# EAGLE board ME433_PCB (EAGLE 8.1.0)
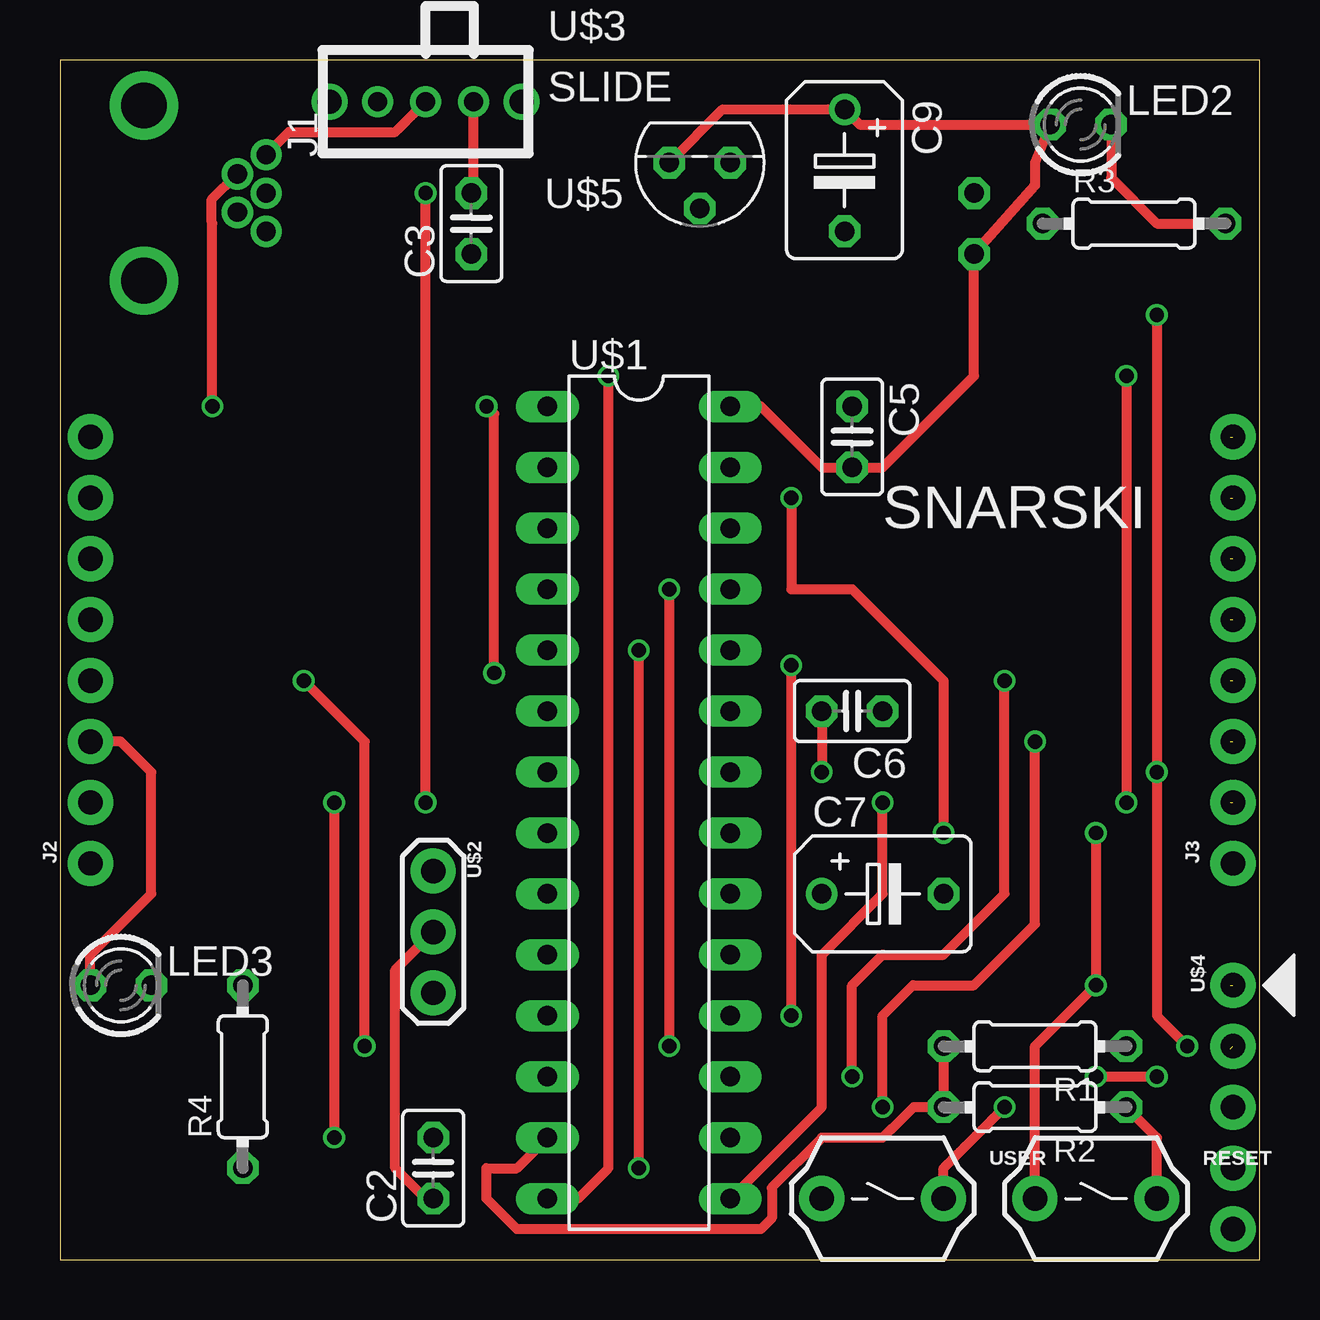
[diagram p0: board, top side]
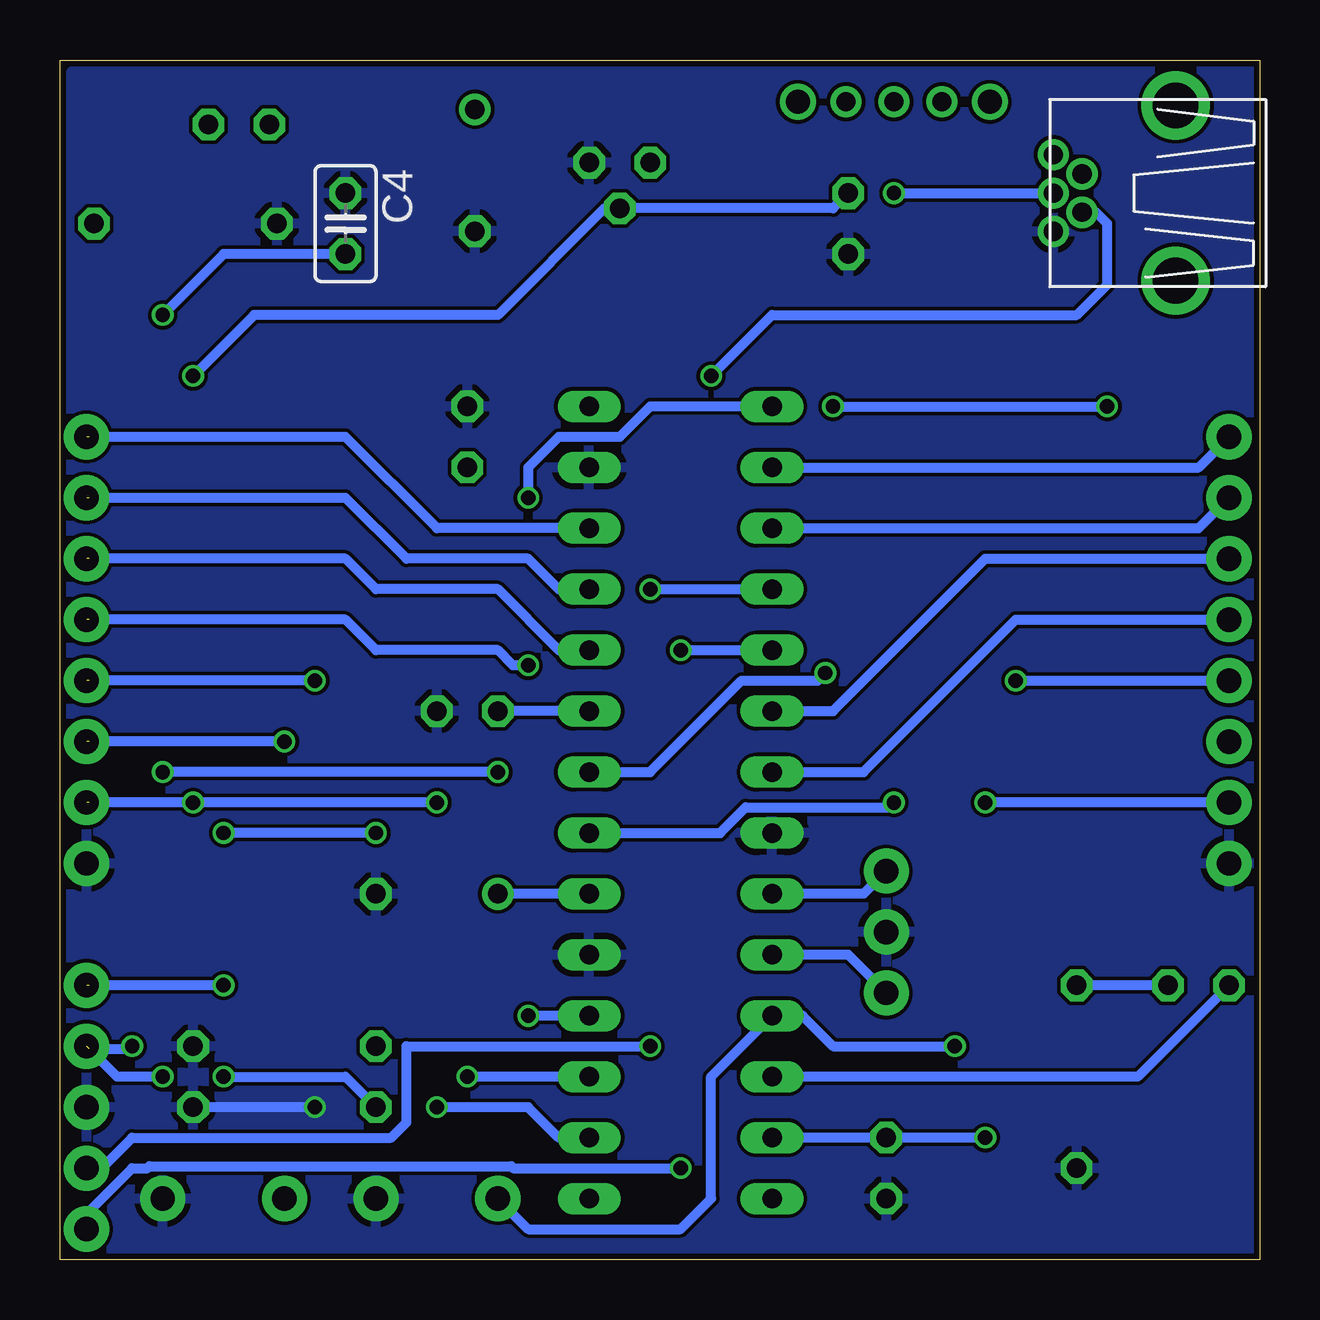
[diagram p1: board, bottom side, seen from below]

Size 50 x 50 mm. Coordinates in mm from the lower left corner, seen from the top.
Outline: 0,0 50,0 50,50 0,50 0,0
Copper layers (1*16): Top 0.035mm / dielectric 1.5mm / Bottom 0.035mm
Design rules "SeeedStudio_2layer_DRU_no_angle_20140221 *": minimum track width 6mil, minimum drill 12mil, track to track 6mil, track to pad 6mil, pad to pad 6mil, via to via 6mil, smd to smd 0mil, copper to edge 10mil, drill to drill 10mil, minimum pad ring 10mil, minimum via ring 6mil, stop-mask expansion 2mil, vias tented up to drill 100mil, thermal gap 10mil

## Footprints (pad centres in the part's own frame; a part is rotated, then mirrored left to right if it is on the bottom)
C025-025X050 = drill 0.813 octagon: 1 -1.27,0; 2 1.27,0
B45181B = drill 0.813: + -2.54,0 | drill 0.813 octagon: - 2.54,0
USB-MB-H = drill 0.8: D+ 5.1,0; D- 3.9,0.8; GND 5.1,-1.6; ID 3.9,-0.8; VBUS 5.1,1.6 | drill 1.9: P$6 0,-3.65; P$7 0,3.65
1X08 = drill 1.016 pad 1.88: 1 0,0; 2 2.54,0; 3 5.08,0; 4 7.62,0; 5 10.16,0; 6 12.7,0; 7 15.24,0; 8 17.78,0
LED3MM = drill 0.813 octagon: A -1.27,0; K 1.27,0
0204/7 = drill 0.813 octagon: 1 -3.81,0; 2 3.81,0
PB = drill 1.016 pad 1.88: 1 -2.54,0; 2 2.54,0
DIL28-3 = drill 0.813 long: 1 -16.51,-3.81; 2 -13.97,-3.81; 3 -11.43,-3.81; 4 -8.89,-3.81; 5 -6.35,-3.81; 6 -3.81,-3.81; 7 -1.27,-3.81; 8 1.27,-3.81; 9 3.81,-3.81; 10 6.35,-3.81; 11 8.89,-3.81; 12 11.43,-3.81; 13 13.97,-3.81; 14 16.51,-3.81; 15 16.51,3.81; 16 13.97,3.81; 17 11.43,3.81; 18 8.89,3.81; 19 6.35,3.81; 20 3.81,3.81; 21 1.27,3.81; 22 -1.27,3.81; 23 -3.81,3.81; 24 -6.35,3.81; 25 -8.89,3.81; 26 -11.43,3.81; 27 -13.97,3.81; 28 -16.51,3.81
OSC = drill 1.016 pad 1.88: 1 -2.54,0; 2 0,0; 3 2.54,0
SLIDE = drill 0.8: 1 -2,0; 2 0,0; 3 2,0 | drill 1: P$1 -4,0; P$2 4,0
1X05 = drill 1.016 pad 1.88: 1 0,0; 2 2.54,0; 3 5.08,0; 4 7.62,0; 5 10.16,0
TO92 = drill 0.813 octagon: 1 -1.27,0; 2 0,1.905; 3 1.27,0

## Placement (x,y rotation side)
C2  0.1uF  [C025-025X050]  15.56,3.81 90 top
C3  0.1uF  [C025-025X050]  17.14,43.18 90 top
C4  0.1uF  [C025-025X050]  38.1,43.18 270 bottom
C5  0.1uF  [C025-025X050]  33.02,34.29 270 top
C6  0.1uF  [C025-025X050]  33.02,22.86 180 top
C7  10uF  [B45181B]  34.29,15.24 0 top
C9  10uF  [B45181B]  32.7,45.4 270 top
J1  USB-MB-H  [USB-MB-H]  3.49,44.45 0 top
J2  [1X08]  1.27,16.51 90 top
J3  [1X08]  48.9,16.51 90 top
LED2  RED  [LED3MM]  42.55,47.31 0 top
LED3  GREEN  [LED3MM]  2.54,11.43 0 top
R1  10k  [0204/7]  40.64,8.89 180 top
R2  10k  [0204/7]  40.64,6.35 180 top
R3  330  [0204/7]  44.77,43.18 0 top
R4  330  [0204/7]  7.62,7.62 90 top
RESET  PB  [PB]  43.18,2.54 0 top
U$1  PIC32  [DIL28-3]  24.13,19.05 270 top
U$2  OSC  [OSC]  15.56,13.65 270 top
U$3  SLIDE  [SLIDE]  15.24,48.26 0 top
U$4  PICKIT  [1X05]  48.9,11.43 270 top
U$5  MCP1702  [TO92]  26.67,45.72 180 top
USER  PB  [PB]  34.29,2.54 0 top

## Library data of the parts
C2-C7 C9 J1 LED2 LED3 R1-R4 RESET U$1-U$5 USER = ME433
J2 J3 = ME433; PROD_ID: CONN-08438

## Nets
+3V3: C2.2 C4.2 C5.2 C6.2 C9.+ J2.2 LED2.A R1.2 R2.2 U$1.13 U$1.23 U$1.28 U$4.2 U$5.3
+5V: C3.2 J3.2 U$1.15 U$3.3 U$5.2
A0: J2.8 U$1.2
A1: J2.7 U$1.3
A4/LED: J2.3 LED3.A U$1.12
B2: J2.6 U$1.6
B3: J2.5 U$1.7
B4/USER: J2.4 U$1.11 USER.1
B7: J3.3 U$1.16
B8: J3.4 U$1.17
B9: J3.5 U$1.18
B13: J3.6 U$1.24
B14: J3.7 U$1.25
B15: J3.8 U$1.26
D+/B10: J1.D+ U$1.21
D-/B11: J1.D- U$1.22
GND: C2.1 C3.1 C4.1 C5.1 C6.1 C7.- C9.- J1.GND J2.1 J3.1 R1.1 R2.1 R3.1 R4.1 RESET.2 U$1.8 U$1.19 U$1.27 U$2.2 U$4.3 U$5.1 USER.2
ID/B5: J1.ID U$1.14
MCLR: RESET.1 U$1.1 U$4.1
N$2: LED2.K R3.2
N$6: J1.VBUS U$3.2
N$7: LED3.K R4.2
N$10: C7.+ U$1.20
OCS1: U$1.9 U$2.1
OCS2: U$1.10 U$2.3
PGEC: U$1.5 U$4.5
PGED: U$1.4 U$4.4

## Tracks (layer width: path | path; a pad name or v marks a point on that pad's centre or on a via)
+3V3  (via drill 0.6)  (1 unrouted)
  Top 0.406: R1.2 R2.2 35.58,6.35 34.67,5.44 34.65,5.44 34.29,5.08 31.75,5.08 29.66,2.99 29.67,2.98 29.67,1.73 29.21,1.27 19.05,1.27 17.78,2.54 17.78,3.81 19.05,3.81 U$1.13 | U$5.3 27.62,47.94 C9.+ 33.34,47.31 LED2.A 40.64,45.72 40.64,44.77 C4.2 38.1,36.83 34.29,33.02 C5.2 31.75,33.02 29.21,35.56 U$1.28 | v45.72,7.62 v43.18,7.62 | v11.43,19.05 v11.43,5.08 | v45.72,39.37 v45.72,20.32 45.72,10.16 v46.99,8.89 | C6.2 v31.75,20.32
  Bottom 0.406: U$1.13 C2.2 v11.43,5.08 | v43.18,7.62 38.1,7.62 R2.2 | U$1.23 C6.2 | J2.2 v11.43,19.05 | C4.2 43.18,41.91 v45.72,39.37 | v31.75,20.32 v45.72,20.32 | v46.99,8.89 47.1,8.78 48.78,8.78 47.62,7.62 v45.72,7.62
+5V  (via drill 0.6)  (1 unrouted)
  Top 0.406: C3.2 17.24,44.55 U$3.3 | U$1.15 31.75,6.35 31.75,12.7 34.29,15.24 v34.29,19.05 | v44.45,36.83 v44.45,19.05
  Bottom 0.406: v34.29,19.05 v44.45,19.05 48.78,19.05 | C3.2 17.78,43.81 U$5.2 27.3,43.81 31.75,39.37 41.91,39.37 v44.45,36.83
A0
  Bottom 0.406: U$1.2 2.54,33.02 J2.8
A1
  Bottom 0.406: U$1.3 2.54,30.48 J2.7
A4/LED
  Top 0.406: LED3.A 1.27,12.7 3.81,15.24 3.81,20.32 2.54,21.59 J2.3
  Bottom 0.406: LED3.A 5.08,7.62 U$1.12
B2
  Bottom 0.406: U$1.6 17.78,22.86 11.43,29.21 J2.6
B3
  Bottom 0.406: J2.5 10.16,26.67 16.51,20.32 U$1.7
B4/USER  (via drill 0.6)
  Top 0.406: v12.7,8.89 12.7,21.59 v10.16,24.13
  Bottom 0.406: USER.1 30.48,1.27 24.13,1.27 22.86,2.54 22.86,7.62 U$1.11 19.05,10.16 17.78,8.89 v12.7,8.89 | v10.16,24.13 J2.4
B7  (via drill 0.6)  (1 unrouted)
  Top 0.406: v34.29,6.35 34.29,10.16 35.56,11.43 38.1,11.43 40.64,13.97 v40.64,21.59
  Bottom 0.406: U$1.16 29.21,5.08 30.48,6.35 v34.29,6.35 | v40.64,21.59 48.78,21.59
B8  (via drill 0.6)  (1 unrouted)
  Top 0.406: v33.02,7.62 33.02,11.43 34.29,12.7 36.83,12.7 39.37,15.24 v39.37,24.13
  Bottom 0.406: U$1.17 v33.02,7.62 | v39.37,24.13 48.78,24.13
B9  (via drill 0.6)  (1 unrouted)
  Top 0.406: v30.48,10.16 30.48,24.13 v30.48,24.77
  Bottom 0.406: U$1.18 v30.48,10.16 | v30.48,24.77 31.11,24.77 31.75,25.4 36.83,25.4 38.1,26.67 48.78,26.67
B13  (1 unrouted)
  Bottom 0.406: U$1.24 29.21,25.4 31.75,27.94 36.83,27.94 38.1,29.21 48.78,29.21
B14  (1 unrouted)
  Bottom 0.406: U$1.25 29.21,27.94 30.48,29.21 35.56,29.21 38.1,31.75 48.78,31.75
B15  (1 unrouted)
  Bottom 0.406: U$1.26 34.29,30.48 38.1,34.29 48.78,34.29
D+/B10  (via drill 0.6)
  Top 0.406: v15.24,19.05 v15.24,44.45
  Bottom 0.406: U$1.21 22.49,17.78 21.42,18.85 15.44,18.85 v15.24,19.05 | v15.24,44.45 J1.D+
D-/B11  (via drill 0.6)
  Top 0.406: v18.1,24.45 18.1,35.24 v17.78,35.56 | v6.35,35.56 6.35,43.19 6.33,43.21 6.33,44.19 J1.D-
  Bottom 0.406: U$1.22 25.4,20.32 21.59,24.13 18.41,24.13 v18.1,24.45 | v17.78,35.56 v6.35,35.56
GND  (via drill 0.6)
  Top 0.406: RESET.2 45.72,5.08 R2.1 | USER.2 36.83,3.81 v39.37,6.35 | C2.1 15.24,2.54 13.97,3.81 13.97,12.06 U$2.2
  Bottom 0.406: v39.37,6.35 R2.1
  pour Bottom: 0,49.53 0,0 49.53,0 49.53,49.53
  pour Bottom: 0,49.53 0,0 49.53,0 49.53,49.53
ID/B5  (via drill 0.6)
  Top 0.406: U$1.14 21.59,2.54 22.86,3.81 v22.86,36.83
  Bottom 0.406: v22.86,36.83 20.32,39.37 7.62,39.37 6.35,40.64 6.35,43.18 6.82,43.65 J1.ID
MCLR  (via drill 0.6)  (1 unrouted)
  Top 0.406: RESET.1 40.64,8.89 v43.18,11.43 v43.18,17.78 | v30.48,31.75 30.48,27.94 33.02,27.94 36.83,24.13 v36.83,17.78
  Bottom 0.406: v43.18,11.43 48.78,11.43 | U$1.1 25.4,35.56 26.67,34.29 29.21,34.29 30.48,33.02 v30.48,31.75 | v36.83,17.78 v43.18,17.78
N$2
  Top 0.406: LED2.K 43.81,45.09 45.72,43.18 R3.2
N$6
  Top 0.406: J1.VBUS 9.53,46.99 13.97,46.99 U$3.2
N$7
  Bottom 0.406: LED3.K R4.2
N$10
  Bottom 0.406: U$1.20 C7.+
OCS1
  Bottom 0.406: U$2.1 16.51,15.24 U$1.9
OCS2
  Bottom 0.406: U$2.3 17.14,12.7 U$1.10
PGEC  (via drill 0.6)
  Top 0.406: v24.13,3.81 v24.13,25.4
  Bottom 0.406: U$4.5 48.9,1.91 46.99,3.81 46.35,3.81 46.28,3.89 31.19,3.89 31.12,3.81 v24.13,3.81 | v24.13,25.4 U$1.5
PGED  (via drill 0.6)
  Top 0.406: v25.4,8.89 v25.4,27.94
  Bottom 0.406: U$4.4 48.26,3.81 46.99,5.08 36.2,5.08 35.56,5.71 35.56,8.89 v25.4,8.89 | v25.4,27.94 U$1.4

## Text on the board
tPlace: SNARSKI